# EAGLE board protoboard (EAGLE 7.2.0)
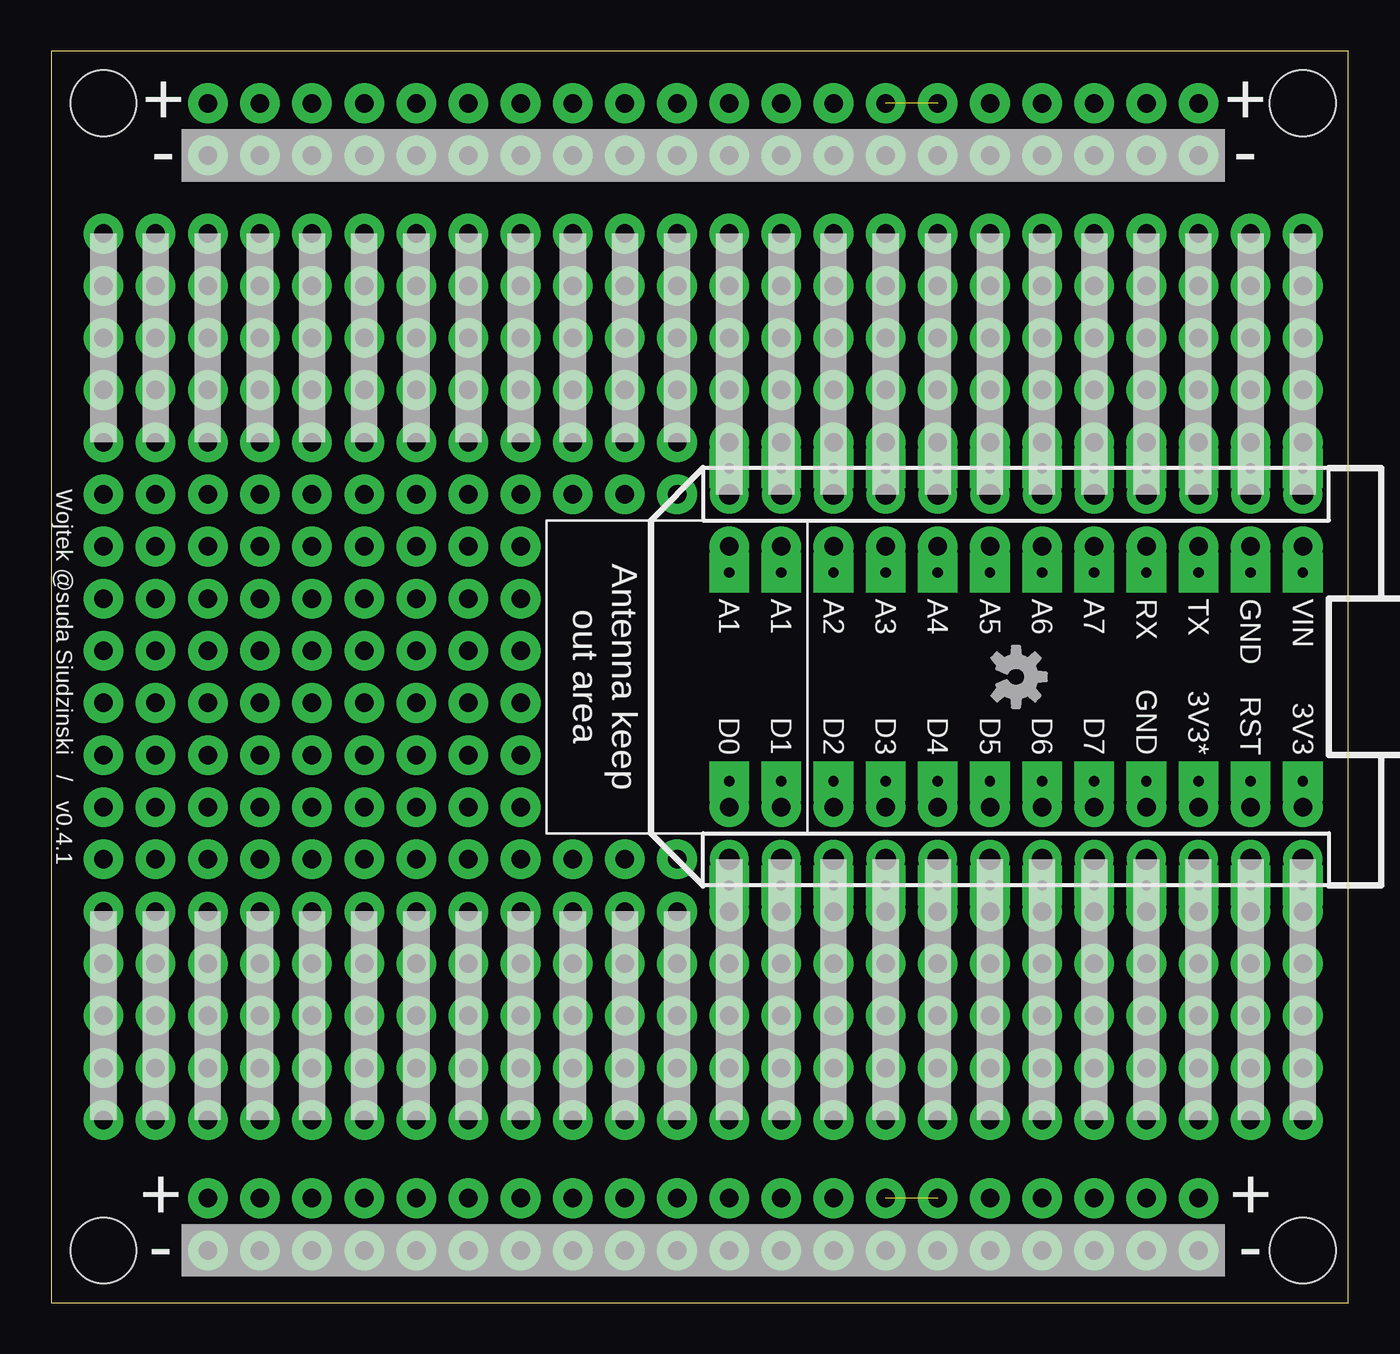
[diagram p0: board, top side]
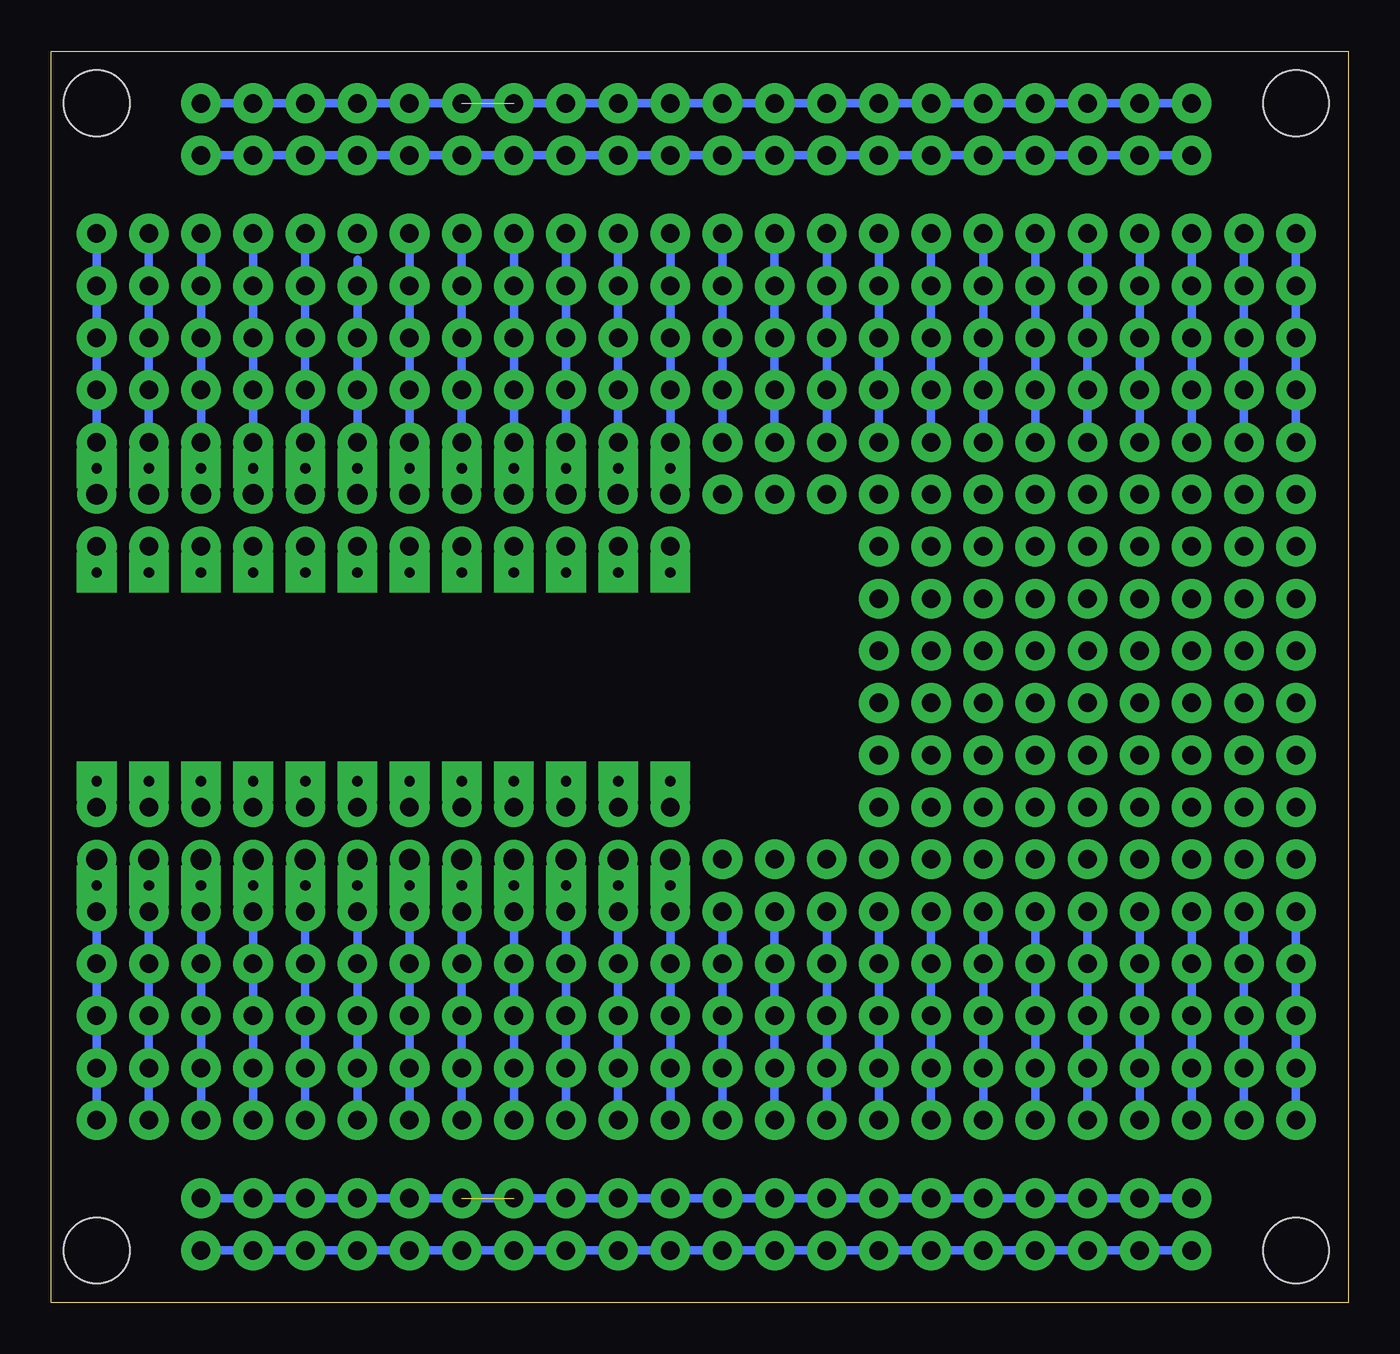
[diagram p1: board, bottom side, seen from below]

Size 63.17 x 60.95 mm. Coordinates in mm from the lower left corner, seen from the top.
Outline: 0,0 63.17,0 63.17,60.95 0,60.95 0,0
Copper layers (1*16): Top 0.035mm / dielectric 1.5mm / Bottom 0.035mm
Design rules "default": minimum track width 10mil, minimum drill 24mil, track to track 8mil, track to pad 8mil, pad to pad 8mil, via to via 8mil, smd to smd 8mil, copper to edge 40mil, drill to drill 8mil, minimum pad ring 10mil, minimum via ring 8mil, stop-mask expansion 4mil, vias tented up to drill 0mil, thermal gap 10mil
Holes 3.2 mm at 2.54,58.42 60.96,58.42 2.54,2.54 60.96,2.54

## Footprints (pad centres in the part's own frame; a part is rotated, then mirrored left to right if it is on the bottom)
SPARK_CORE = drill 1.016 pad 1.88: 1 -8.89,13.97; 2 -8.89,11.43; 3 -8.89,8.89; 4 -8.89,6.35; 5 -8.89,3.81; 6 -8.89,1.27; 7 -8.89,-1.27; 8 -8.89,-3.81; 9 -8.89,-6.35; 10 -8.89,-8.89; 11 -8.89,-11.43; 12 -8.89,-13.97; 13 8.89,-13.97; 14 8.89,-11.43; 15 8.89,-8.89; 16 8.89,-6.35; 17 8.89,-3.81; 18 8.89,-1.27; 19 8.89,1.27; 20 8.89,3.81; 21 8.89,6.35; 22 8.89,8.89; 23 8.89,11.43; 24 8.89,13.97

## Placement (x,y rotation side)
CORE/PHOTON  SPARK_CORECORE  [SPARK_CORE]  46.99,30.48 270 top
E$1  [OSHW-LOGO-S]  46.99,30.48 270 top

## Library data of the parts
CORE/PHOTON E$1 = Spark

## Tracks (layer width: path | path; a pad name or v marks a point on that pad's centre or on a via)
S$1  (via drill 0.9 pad 1.93)
  Bottom 0.406: v60.96,8.89 v60.96,11.43 v60.96,13.97 v60.96,16.51 v60.96,19.05
S$2  (via drill 0.9 pad 1.93)
  Bottom 0.406: v5.08,8.89 v5.08,11.43 v5.08,16.51 v5.08,19.05
S$3  (via drill 0.9 pad 1.93)
  Bottom 0.406: v15.24,52.07 v15.24,46.99 v15.24,44.45 v15.24,41.91
S$4  (via drill 0.9 pad 1.93)
  Bottom 0.406: v55.88,2.54 v53.34,2.54 v50.8,2.54 v48.26,2.54 v45.72,2.54 v43.18,2.54 v40.64,2.54 v38.1,2.54 v35.56,2.54 v33.02,2.54 v30.48,2.54 v27.94,2.54 v25.4,2.54 v22.86,2.54 v20.32,2.54 v17.78,2.54 v15.24,2.54 v12.7,2.54 v10.16,2.54 v7.62,2.54
S$5  (via drill 0.9 pad 1.93)
  Bottom 0.406: v55.88,55.88 v53.34,55.88 v50.8,55.88 v48.26,55.88 v45.72,55.88 v43.18,55.88 v40.64,55.88 v38.1,55.88 v35.56,55.88 v33.02,55.88 v30.48,55.88 v27.94,55.88 v25.4,55.88 v22.86,55.88 v20.32,55.88 v17.78,55.88 v15.24,55.88 v12.7,55.88 v10.16,55.88 v7.62,55.88
S$6  (via drill 0.9 pad 1.93)  (1 unrouted)
  Bottom 0.406: v7.62,5.08 v10.16,5.08 v12.7,5.08 v15.24,5.08 v17.78,5.08 v20.32,5.08 v22.86,5.08 v25.4,5.08 v27.94,5.08 v30.48,5.08 v33.02,5.08 v35.56,5.08 v38.1,5.08 v43.18,5.08 v45.72,5.08 v48.26,5.08 v50.8,5.08 v53.34,5.08 v55.88,5.08
  other vias: 40.64,5.08
S$7  (via drill 0.9 pad 1.93)
  Bottom 0.406: v5.08,41.91 v5.08,44.45 v5.08,46.99 v5.08,49.53 v5.08,52.07
S$8  (via drill 0.5 pad 1.93)
  other vias: 33.02,35.56
S$9  (via drill 0.5 pad 1.93)
  other vias: 35.56,35.56
S$10  (via drill 0.5 pad 1.93)
  other vias: 38.1,35.56
S$11  (via drill 0.9 pad 1.93)
  Bottom 0.406: v2.54,52.07 v2.54,49.53 v2.54,46.99 v2.54,44.45 v2.54,41.91
S$12  (via drill 0.5 pad 1.93)
  other vias: 40.64,35.56
S$13  (via drill 0.9 pad 1.93)  (1 unrouted)
  Bottom 0.406: v7.62,58.42 v10.16,58.42 v12.7,58.42 v15.24,58.42 v17.78,58.42 v20.32,58.42 v22.86,58.42 v25.4,58.42 v27.94,58.42 v30.48,58.42 v33.02,58.42 v35.56,58.42 v38.1,58.42 v43.18,58.42 v45.72,58.42 v48.26,58.42 v50.8,58.42 v53.34,58.42 v55.88,58.42
  other vias: 40.64,58.42
S$14  (via drill 0.5 pad 1.93)
  other vias: 43.18,35.56
S$15  (via drill 0.5 pad 1.93)
  other vias: 45.72,35.56
S$16  (via drill 0.5 pad 1.93)
  other vias: 48.26,35.56
S$17  (via drill 0.5 pad 1.93)
  other vias: 50.8,35.56
S$18  (via drill 0.5 pad 1.93)
  other vias: 53.34,35.56
S$19  (via drill 0.5 pad 1.93)
  other vias: 55.88,35.56
S$20  (via drill 0.5 pad 1.93)
  other vias: 58.42,35.56
S$21  (via drill 0.5 pad 1.93)
  other vias: 60.96,35.56
S$22  (via drill 0.5 pad 1.93)
  other vias: 33.02,25.4
S$23  (via drill 0.5 pad 1.93)
  other vias: 35.56,25.4
S$24  (via drill 0.9 pad 1.93)
  other vias: 45.72,44.45
S$25  (via drill 0.5 pad 1.93)
  other vias: 38.1,25.4
S$26  (via drill 0.5 pad 1.93)
  other vias: 40.64,25.4
S$27  (via drill 0.5 pad 1.93)
  other vias: 43.18,25.4
S$28  (via drill 0.9 pad 1.93)
  other vias: 33.02,24.13
S$29  (via drill 0.9 pad 1.93)
  other vias: 35.56,24.13
S$30  (via drill 0.5 pad 1.93)
  other vias: 45.72,25.4
S$31  (via drill 0.5 pad 1.93)
  other vias: 48.26,25.4
S$32  (via drill 0.5 pad 1.93)
  other vias: 50.8,25.4
S$33  (via drill 0.5 pad 1.93)
  other vias: 53.34,25.4
S$34  (via drill 0.5 pad 1.93)
  other vias: 55.88,25.4
S$35  (via drill 0.5 pad 1.93)
  other vias: 58.42,25.4
S$36  (via drill 0.5 pad 1.93)
  other vias: 60.96,25.4
S$37  (via drill 0.5 pad 1.93)
  other vias: 33.02,40.64
S$38  (via drill 0.5 pad 1.93)
  other vias: 35.56,40.64
S$39  (via drill 0.5 pad 1.93)
  other vias: 38.1,40.64
S$40  (via drill 0.5 pad 1.93)
  other vias: 40.64,40.64
S$41  (via drill 0.5 pad 1.93)
  other vias: 43.18,40.64
S$42  (via drill 0.5 pad 1.93)
  other vias: 45.72,40.64
S$43  (via drill 0.9 pad 1.93)
  Bottom 0.406: v35.56,52.07 v35.56,49.53 v35.56,46.99 v35.56,44.45 v35.56,41.91
S$44  (via drill 0.5 pad 1.93)
  other vias: 48.26,40.64
S$45  (via drill 0.5 pad 1.93)
  other vias: 50.8,40.64
S$46  (via drill 0.5 pad 1.93)
  other vias: 53.34,40.64
S$47  (via drill 0.5 pad 1.93)
  other vias: 55.88,40.64
S$48  (via drill 0.9 pad 1.93)
  other vias: 38.1,24.13
S$49  (via drill 0.5 pad 1.93)
  other vias: 58.42,40.64
S$50  (via drill 0.9 pad 1.93)
  other vias: 5.08,39.37
S$51  (via drill 0.9 pad 1.93)
  other vias: 15.24,36.83
S$52  (via drill 0.9 pad 1.93)
  other vias: 5.08,34.29
S$53  (via drill 0.5 pad 1.93)
  other vias: 60.96,40.64
S$54  (via drill 0.9 pad 1.93)
  Bottom 0.406: v10.16,41.91 v10.16,44.45 v10.16,46.99 v10.16,49.53 v10.16,52.07
S$55  (via drill 0.9 pad 1.93)
  other vias: 2.54,36.83
S$56  (via drill 0.9 pad 1.93)
  other vias: 5.08,36.83
S$57  (via drill 0.9 pad 1.93)
  other vias: 7.62,36.83
S$58  (via drill 0.9 pad 1.93)
  other vias: 10.16,36.83
S$59  (via drill 0.9 pad 1.93)
  other vias: 12.7,36.83
S$60  (via drill 0.9 pad 1.93)
  other vias: 15.24,34.29
S$61  (via drill 0.9 pad 1.93)
  other vias: 15.24,31.75
S$62  (via drill 0.9 pad 1.93)
  other vias: 5.08,29.21
S$63  (via drill 0.9 pad 1.93)
  other vias: 15.24,26.67
S$64  (via drill 0.9 pad 1.93)
  other vias: 15.24,24.13
S$65  (via drill 0.9 pad 1.93)
  other vias: 12.7,34.29
S$66  (via drill 0.5 pad 1.93)
  other vias: 60.96,20.32
S$67  (via drill 0.9 pad 1.93)
  other vias: 10.16,34.29
S$68  (via drill 0.5 pad 1.93)
  other vias: 58.42,20.32
S$70  (via drill 0.5 pad 1.93)
  other vias: 55.88,20.32
S$71  (via drill 0.5 pad 1.93)
  other vias: 53.34,20.32
S$72  (via drill 0.5 pad 1.93)
  other vias: 50.8,20.32
S$74  (via drill 0.5 pad 1.93)
  other vias: 48.26,20.32
S$75  (via drill 0.5 pad 1.93)
  other vias: 45.72,20.32
S$76  (via drill 0.5 pad 1.93)
  other vias: 43.18,20.32
S$77  (via drill 0.9 pad 1.93)
  other vias: 60.96,36.83
S$78  (via drill 0.9 pad 1.93)
  other vias: 40.64,36.83
S$79  (via drill 0.9 pad 1.93)
  other vias: 43.18,36.83
S$80  (via drill 0.9 pad 1.93)
  other vias: 45.72,36.83
S$81  (via drill 0.9 pad 1.93)
  other vias: 50.8,24.13
S$82  (via drill 0.9 pad 1.93)
  other vias: 40.64,24.13
S$83  (via drill 0.9 pad 1.93)
  other vias: 43.18,24.13
S$84  (via drill 0.9 pad 1.93)
  other vias: 45.72,24.13
S$85  (via drill 0.5 pad 1.93)
  other vias: 40.64,20.32
S$86  (via drill 0.5 pad 1.93)
  other vias: 38.1,20.32
S$87  (via drill 0.5 pad 1.93)
  other vias: 35.56,20.32
S$88  (via drill 0.5 pad 1.93)
  other vias: 33.02,20.32
S$89  (via drill 0.9 pad 1.93)
  other vias: 12.7,39.37 15.24,39.37
S$90  (via drill 0.9 pad 1.93)
  other vias: 10.16,39.37
S$91  (via drill 0.9 pad 1.93)
  other vias: 7.62,39.37
S$92  (via drill 0.9 pad 1.93)
  other vias: 2.54,39.37
S$93  (via drill 0.9 pad 1.93)
  Bottom 0.406: v15.24,8.89 v15.24,11.43 v15.24,13.97 v15.24,16.51 v15.24,19.05
S$94  (via drill 0.9 pad 1.93)
  Bottom 0.406: v10.16,19.05 v10.16,16.51 v10.16,13.97 v10.16,11.43 v10.16,8.89
S$95  (via drill 0.9 pad 1.93)
  Bottom 0.406: v7.62,19.05 v7.62,13.97 v7.62,11.43 v7.62,8.89
S$96  (via drill 0.9 pad 1.93)
  Bottom 0.406: v2.54,19.05 v2.54,16.51 v2.54,13.97 v2.54,11.43 v2.54,8.89
S$97  (via drill 0.9 pad 1.93)
  other vias: 2.54,21.59
S$98  (via drill 0.9 pad 1.93)
  other vias: 5.08,21.59
S$99  (via drill 0.9 pad 1.93)
  other vias: 7.62,21.59
S$100  (via drill 0.9 pad 1.93)
  other vias: 10.16,21.59
S$101  (via drill 0.9 pad 1.93)
  other vias: 12.7,21.59 15.24,21.59
S$102  (via drill 0.9 pad 1.93)
  Bottom 0.406: v12.7,19.05 v12.7,16.51 v12.7,13.97 v12.7,11.43 v12.7,8.89
S$103  (via drill 0.9 pad 1.93)
  other vias: 7.62,16.51
S$104  (via drill 0.9 pad 1.93)
  other vias: 5.08,13.97
S$105  (via drill 0.9 pad 1.93)
  Bottom 0.406: v33.02,19.05 v33.02,16.51 v33.02,13.97 v33.02,11.43 v33.02,8.89
S$106  (via drill 0.9 pad 1.93)
  Bottom 0.406: v35.56,19.05 v35.56,16.51 v35.56,13.97 v35.56,11.43 v35.56,8.89
S$107  (via drill 0.9 pad 1.93)
  Bottom 0.406: v38.1,19.05 v38.1,16.51 v38.1,13.97 v38.1,11.43 v38.1,8.89
S$108  (via drill 0.9 pad 1.93)
  Bottom 0.406: v40.64,19.05 v40.64,16.51 v40.64,13.97 v40.64,11.43 v40.64,8.89
S$109  (via drill 0.9 pad 1.93)
  Bottom 0.406: v43.18,19.05 v43.18,16.51 v43.18,13.97 v43.18,11.43 v43.18,8.89
S$110  (via drill 0.9 pad 1.93)
  Bottom 0.406: v45.72,19.05 v45.72,16.51 v45.72,13.97 v45.72,11.43 v45.72,8.89
S$111  (via drill 0.9 pad 1.93)
  Bottom 0.406: v48.26,19.05 v48.26,16.51 v48.26,13.97 v48.26,11.43 v48.26,8.89
S$112  (via drill 0.9 pad 1.93)
  Bottom 0.406: v50.8,19.05 v50.8,16.51 v50.8,13.97 v50.8,11.43 v50.8,8.89
S$113  (via drill 0.9 pad 1.93)
  Bottom 0.406: v53.34,19.05 v53.34,16.51 v53.34,13.97 v53.34,11.43 v53.34,8.89
S$114  (via drill 0.9 pad 1.93)
  Bottom 0.406: v55.88,19.05 v55.88,16.51 v55.88,13.97 v55.88,11.43 v55.88,8.89
S$115  (via drill 0.9 pad 1.93)
  Bottom 0.406: v58.42,19.05 v58.42,16.51 v58.42,13.97 v58.42,11.43 v58.42,8.89
S$116  (via drill 0.9 pad 1.93)
  Bottom 0.406: v60.96,52.07 v60.96,49.53 v60.96,46.99 v60.96,44.45 v60.96,41.91
S$117  (via drill 0.9 pad 1.93)
  Bottom 0.406: v58.42,52.07 v58.42,49.53 v58.42,46.99 v58.42,44.45 v58.42,41.91
S$118  (via drill 0.9 pad 1.93)
  Bottom 0.406: v55.88,52.07 v55.88,49.53 v55.88,46.99 v55.88,44.45 v55.88,41.91
S$119  (via drill 0.9 pad 1.93)
  Bottom 0.406: v53.34,52.07 v53.34,49.53 v53.34,46.99 v53.34,44.45 v53.34,41.91
S$120  (via drill 0.9 pad 1.93)
  Bottom 0.406: v50.8,52.07 v50.8,49.53 v50.8,46.99 v50.8,44.45 v50.8,41.91
S$121  (via drill 0.9 pad 1.93)
  Bottom 0.406: 48.26,50.8 v48.26,49.53 v48.26,46.99 v48.26,44.45 v48.26,41.91
S$122  (via drill 0.9 pad 1.93)
  Bottom 0.406: v45.72,52.07 v45.72,49.53 v45.72,46.99 v45.72,41.91
S$123  (via drill 0.9 pad 1.93)
  Bottom 0.406: v43.18,52.07 v43.18,49.53 v43.18,46.99 v43.18,44.45 v43.18,41.91
S$124  (via drill 0.9 pad 1.93)
  Bottom 0.406: v40.64,52.07 v40.64,49.53 v40.64,46.99 v40.64,44.45 v40.64,41.91
S$125  (via drill 0.9 pad 1.93)
  Bottom 0.406: v38.1,52.07 v38.1,49.53 v38.1,46.99 v38.1,44.45 v38.1,41.91
S$126  (via drill 0.9 pad 1.93)
  Bottom 0.406: v33.02,52.07 v33.02,49.53 v33.02,46.99 v33.02,44.45 v33.02,41.91
S$127  (via drill 0.9 pad 1.93)
  other vias: 48.26,52.07
S$128  (via drill 0.9 pad 1.93)
  other vias: 15.24,49.53
S$129  (via drill 0.9 pad 1.93)
  Bottom 0.406: v12.7,52.07 v12.7,49.53 v12.7,46.99 v12.7,44.45 v12.7,41.91
S$130  (via drill 0.9 pad 1.93)
  Bottom 0.406: v7.62,52.07 v7.62,49.53 v7.62,46.99 v7.62,44.45 v7.62,41.91
S$131  (via drill 0.9 pad 1.93)
  other vias: 7.62,34.29
S$132  (via drill 0.9 pad 1.93)
  other vias: 2.54,34.29
S$133  (via drill 0.9 pad 1.93)
  other vias: 2.54,31.75
S$134  (via drill 0.9 pad 1.93)
  other vias: 5.08,31.75
S$135  (via drill 0.9 pad 1.93)
  other vias: 7.62,31.75
S$136  (via drill 0.9 pad 1.93)
  other vias: 10.16,31.75
S$137  (via drill 0.9 pad 1.93)
  other vias: 12.7,31.75
S$138  (via drill 0.9 pad 1.93)
  other vias: 15.24,29.21
S$139  (via drill 0.9 pad 1.93)
  other vias: 12.7,29.21
S$140  (via drill 0.9 pad 1.93)
  other vias: 10.16,29.21
S$141  (via drill 0.9 pad 1.93)
  other vias: 7.62,29.21
S$142  (via drill 0.9 pad 1.93)
  other vias: 2.54,29.21
S$143  (via drill 0.9 pad 1.93)
  other vias: 2.54,26.67
S$144  (via drill 0.9 pad 1.93)
  other vias: 2.54,24.13
S$145  (via drill 0.9 pad 1.93)
  other vias: 5.08,24.13
S$146  (via drill 0.9 pad 1.93)
  other vias: 5.08,26.67
S$147  (via drill 0.9 pad 1.93)
  other vias: 7.62,26.67
S$148  (via drill 0.9 pad 1.93)
  other vias: 7.62,24.13
S$149  (via drill 0.9 pad 1.93)
  other vias: 10.16,24.13
S$150  (via drill 0.9 pad 1.93)
  other vias: 10.16,26.67
S$151  (via drill 0.9 pad 1.93)
  other vias: 12.7,26.67
S$152  (via drill 0.9 pad 1.93)
  other vias: 12.7,24.13
S$153  (via drill 0.9 pad 1.93)
  other vias: 33.02,36.83
S$154  (via drill 0.9 pad 1.93)
  other vias: 35.56,36.83
S$155  (via drill 0.9 pad 1.93)
  other vias: 38.1,36.83
S$156  (via drill 0.9 pad 1.93)
  other vias: 48.26,36.83
S$157  (via drill 0.9 pad 1.93)
  other vias: 50.8,36.83
S$158  (via drill 0.9 pad 1.93)
  other vias: 53.34,36.83
S$159  (via drill 0.9 pad 1.93)
  other vias: 55.88,36.83
S$160  (via drill 0.9 pad 1.93)
  other vias: 58.42,36.83
S$161  (via drill 0.9 pad 1.93)
  other vias: 60.96,24.13
S$162  (via drill 0.9 pad 1.93)
  other vias: 58.42,24.13
S$163  (via drill 0.9 pad 1.93)
  other vias: 55.88,24.13
S$164  (via drill 0.9 pad 1.93)
  other vias: 53.34,24.13
S$165  (via drill 0.9 pad 1.93)
  other vias: 48.26,24.13
S$166  (via drill 0.9 pad 1.93)
  Bottom 0.406: v17.78,52.07 v17.78,49.53 v17.78,46.99 v17.78,44.45 v17.78,41.91
S$167  (via drill 0.9 pad 1.93)
  Bottom 0.406: v20.32,41.91 v20.32,44.45 v20.32,46.99 v20.32,49.53 v20.32,52.07
S$168  (via drill 0.9 pad 1.93)
  other vias: 30.48,49.53
S$169  (via drill 0.9 pad 1.93)
  Bottom 0.406: v27.94,52.07 v27.94,49.53 v27.94,46.99 v27.94,44.45 v27.94,41.91
S$170  (via drill 0.9 pad 1.93)
  Bottom 0.406: v22.86,52.07 v22.86,49.53 v22.86,46.99 v22.86,44.45 v22.86,41.91
S$171  (via drill 0.9 pad 1.93)
  Bottom 0.406: v25.4,41.91 v25.4,44.45 v25.4,46.99 v25.4,49.53 v25.4,52.07
S$172  (via drill 0.9 pad 1.93)
  other vias: 27.94,21.59 30.48,21.59
S$173  (via drill 0.9 pad 1.93)
  Bottom 0.406: v27.94,19.05 v27.94,16.51 v27.94,13.97 v27.94,11.43 v27.94,8.89
S$174  (via drill 0.9 pad 1.93)
  Bottom 0.406: v30.48,8.89 v30.48,11.43 v30.48,13.97 v30.48,16.51 v30.48,19.05
S$175  (via drill 0.9 pad 1.93)
  other vias: 25.4,21.59
S$176  (via drill 0.9 pad 1.93)
  other vias: 22.86,16.51
S$177  (via drill 0.9 pad 1.93)
  Bottom 0.406: v25.4,19.05 v25.4,16.51 v25.4,13.97 v25.4,11.43 v25.4,8.89
S$178  (via drill 0.9 pad 1.93)
  other vias: 22.86,21.59
S$179  (via drill 0.9 pad 1.93)
  other vias: 20.32,13.97
S$180  (via drill 0.9 pad 1.93)
  Bottom 0.406: v22.86,19.05 v22.86,13.97 v22.86,11.43 v22.86,8.89
S$181  (via drill 0.9 pad 1.93)
  other vias: 17.78,21.59
S$182  (via drill 0.9 pad 1.93)
  Bottom 0.406: v17.78,19.05 v17.78,16.51 v17.78,13.97 v17.78,11.43 v17.78,8.89
S$183  (via drill 0.9 pad 1.93)
  other vias: 20.32,21.59
S$184  (via drill 0.9 pad 1.93)
  Bottom 0.406: v20.32,8.89 v20.32,11.43 v20.32,16.51 v20.32,19.05
S$185  (via drill 0.9 pad 1.93)
  Bottom 0.406: v30.48,52.07 v30.48,46.99 v30.48,44.45 v30.48,41.91
S$186  (via drill 0.9 pad 1.93)
  other vias: 27.94,39.37 30.48,39.37
S$187  (via drill 0.9 pad 1.93)
  other vias: 25.4,39.37
S$188  (via drill 0.9 pad 1.93)
  other vias: 22.86,39.37
S$189  (via drill 0.9 pad 1.93)
  other vias: 17.78,39.37
S$190  (via drill 0.9 pad 1.93)
  other vias: 20.32,39.37
S$191  (via drill 0.9 pad 1.93)
  other vias: 17.78,36.83
S$192  (via drill 0.9 pad 1.93)
  other vias: 20.32,36.83
S$193  (via drill 0.9 pad 1.93)
  other vias: 22.86,36.83
S$200  (via drill 0.9 pad 1.93)
  other vias: 22.86,34.29
S$201  (via drill 0.9 pad 1.93)
  other vias: 17.78,34.29
S$202  (via drill 0.9 pad 1.93)
  other vias: 20.32,34.29
S$203  (via drill 0.9 pad 1.93)
  other vias: 17.78,31.75
S$204  (via drill 0.9 pad 1.93)
  other vias: 20.32,31.75
S$205  (via drill 0.9 pad 1.93)
  other vias: 22.86,31.75
S$212  (via drill 0.9 pad 1.93)
  other vias: 22.86,29.21
S$213  (via drill 0.9 pad 1.93)
  other vias: 17.78,29.21
S$214  (via drill 0.9 pad 1.93)
  other vias: 20.32,29.21
S$215  (via drill 0.9 pad 1.93)
  other vias: 17.78,26.67
S$216  (via drill 0.9 pad 1.93)
  other vias: 20.32,26.67
S$217  (via drill 0.9 pad 1.93)
  other vias: 22.86,26.67
S$221  (via drill 0.9 pad 1.93)
  other vias: 17.78,24.13
S$222  (via drill 0.9 pad 1.93)
  other vias: 20.32,24.13
S$223  (via drill 0.9 pad 1.93)
  other vias: 22.86,24.13

## Text on the board
tPlace: + / - | + / - | VIN / GND / TX / RX / A7 / A6 / A5 / A4 / A3 / A2 / A1 / A1 | Wojtek @suda Siudzinski / v0.4.1 | Antenna keep / out area | 3V3 / RST / 3V3* / GND / D7 / D6 / D5 / D4 / D3 / D2 / D1 / D0 | + / - | + / -